# Altium PCB Bridge.PcbDoc
Units mm, origin at the board's own origin, x right, y up, seen from the top; angles counter-clockwise.
Board outline 41.53 x 42.04 mm, 2 copper layers (Top Layer, Bottom Layer); 12 components, 8 nets, 27 pads, 0 vias.
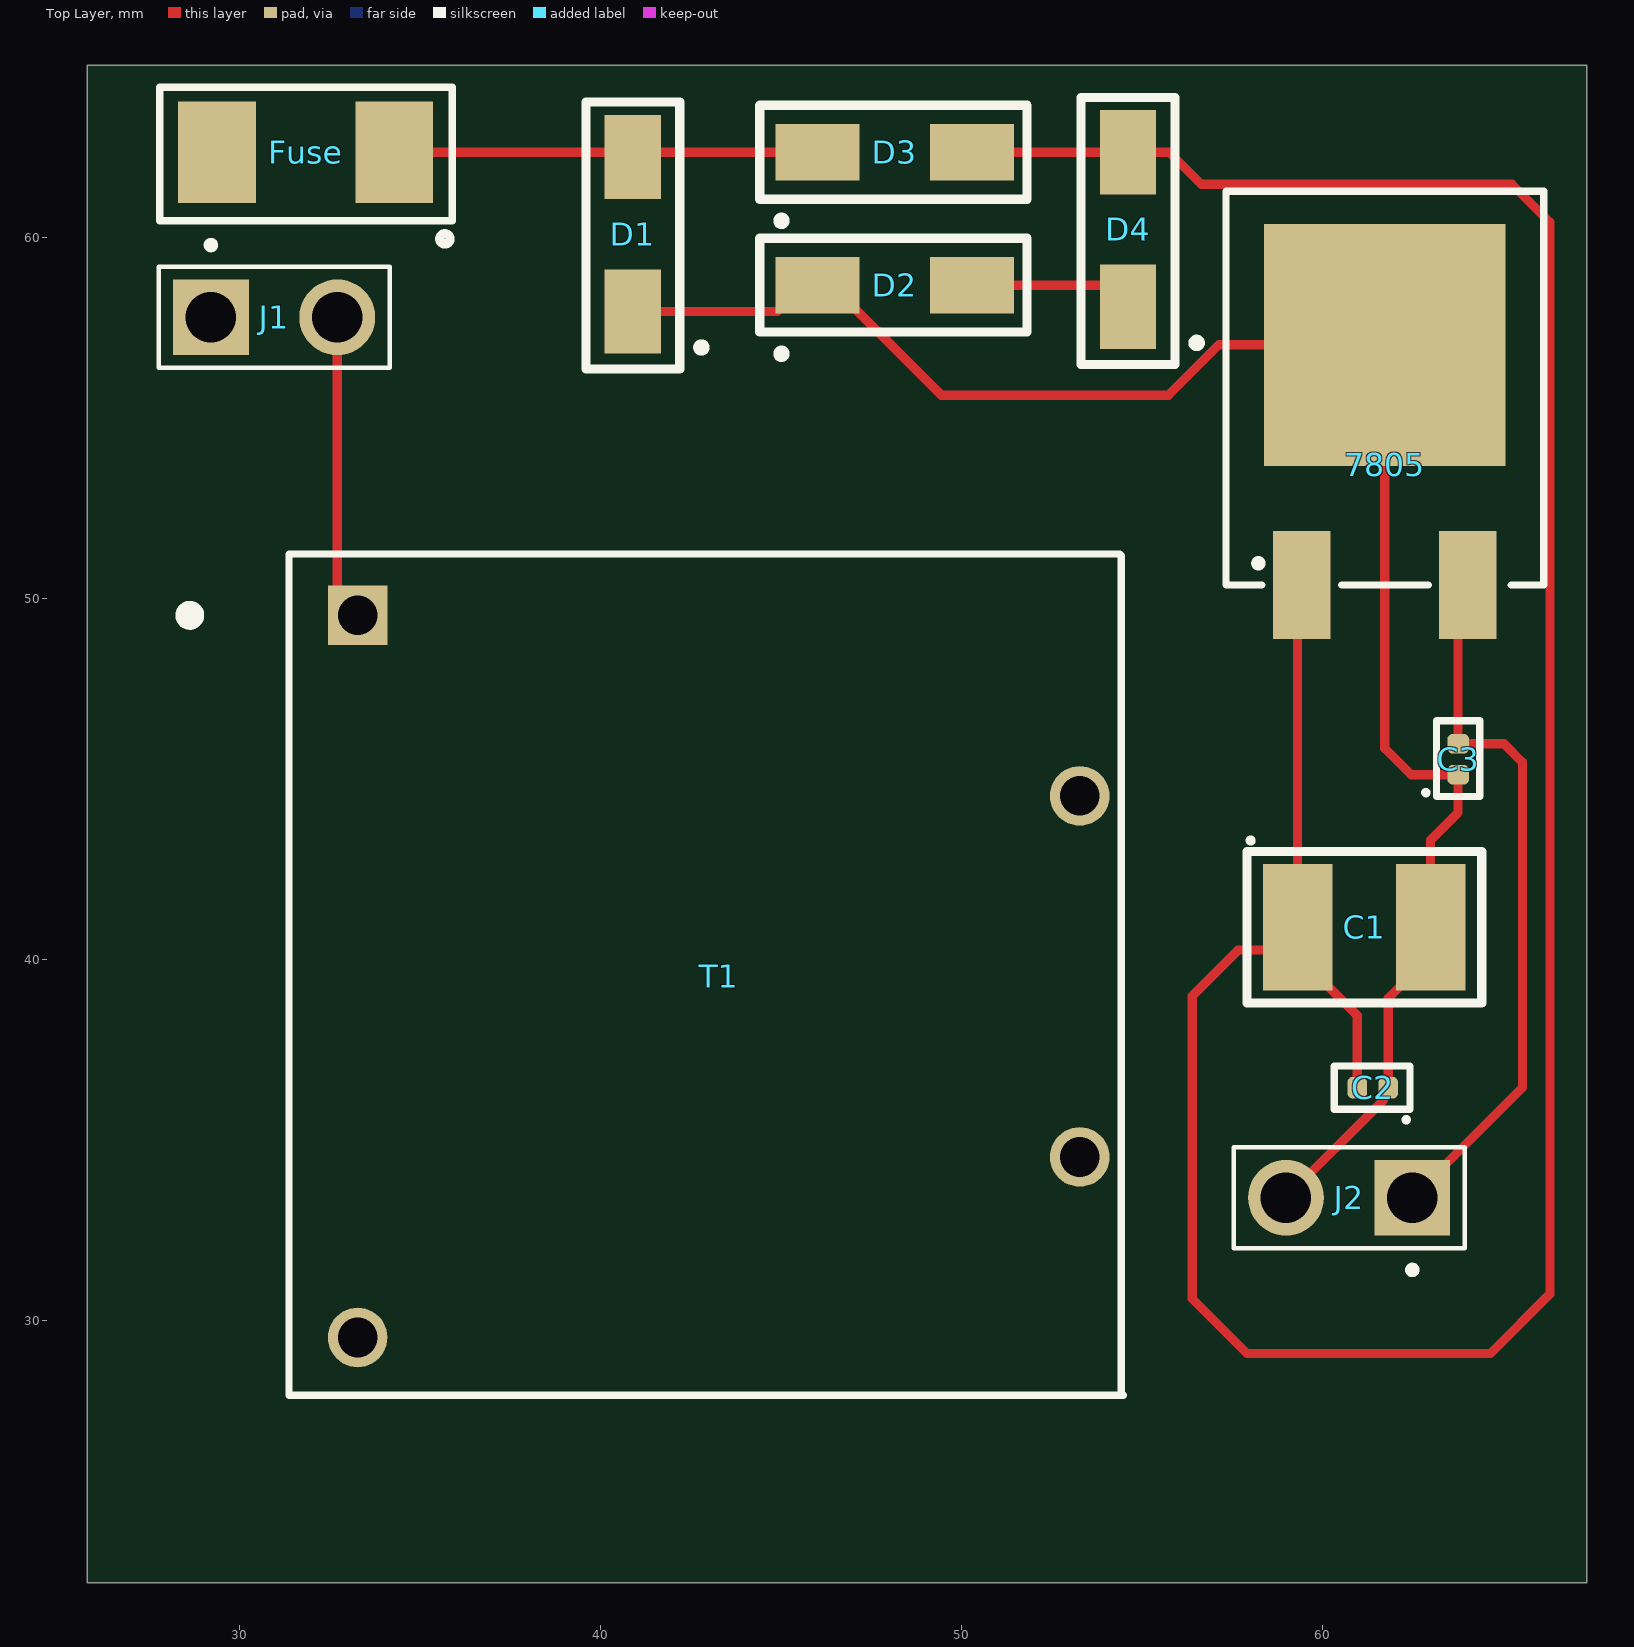
[diagram p0: Top Layer view]
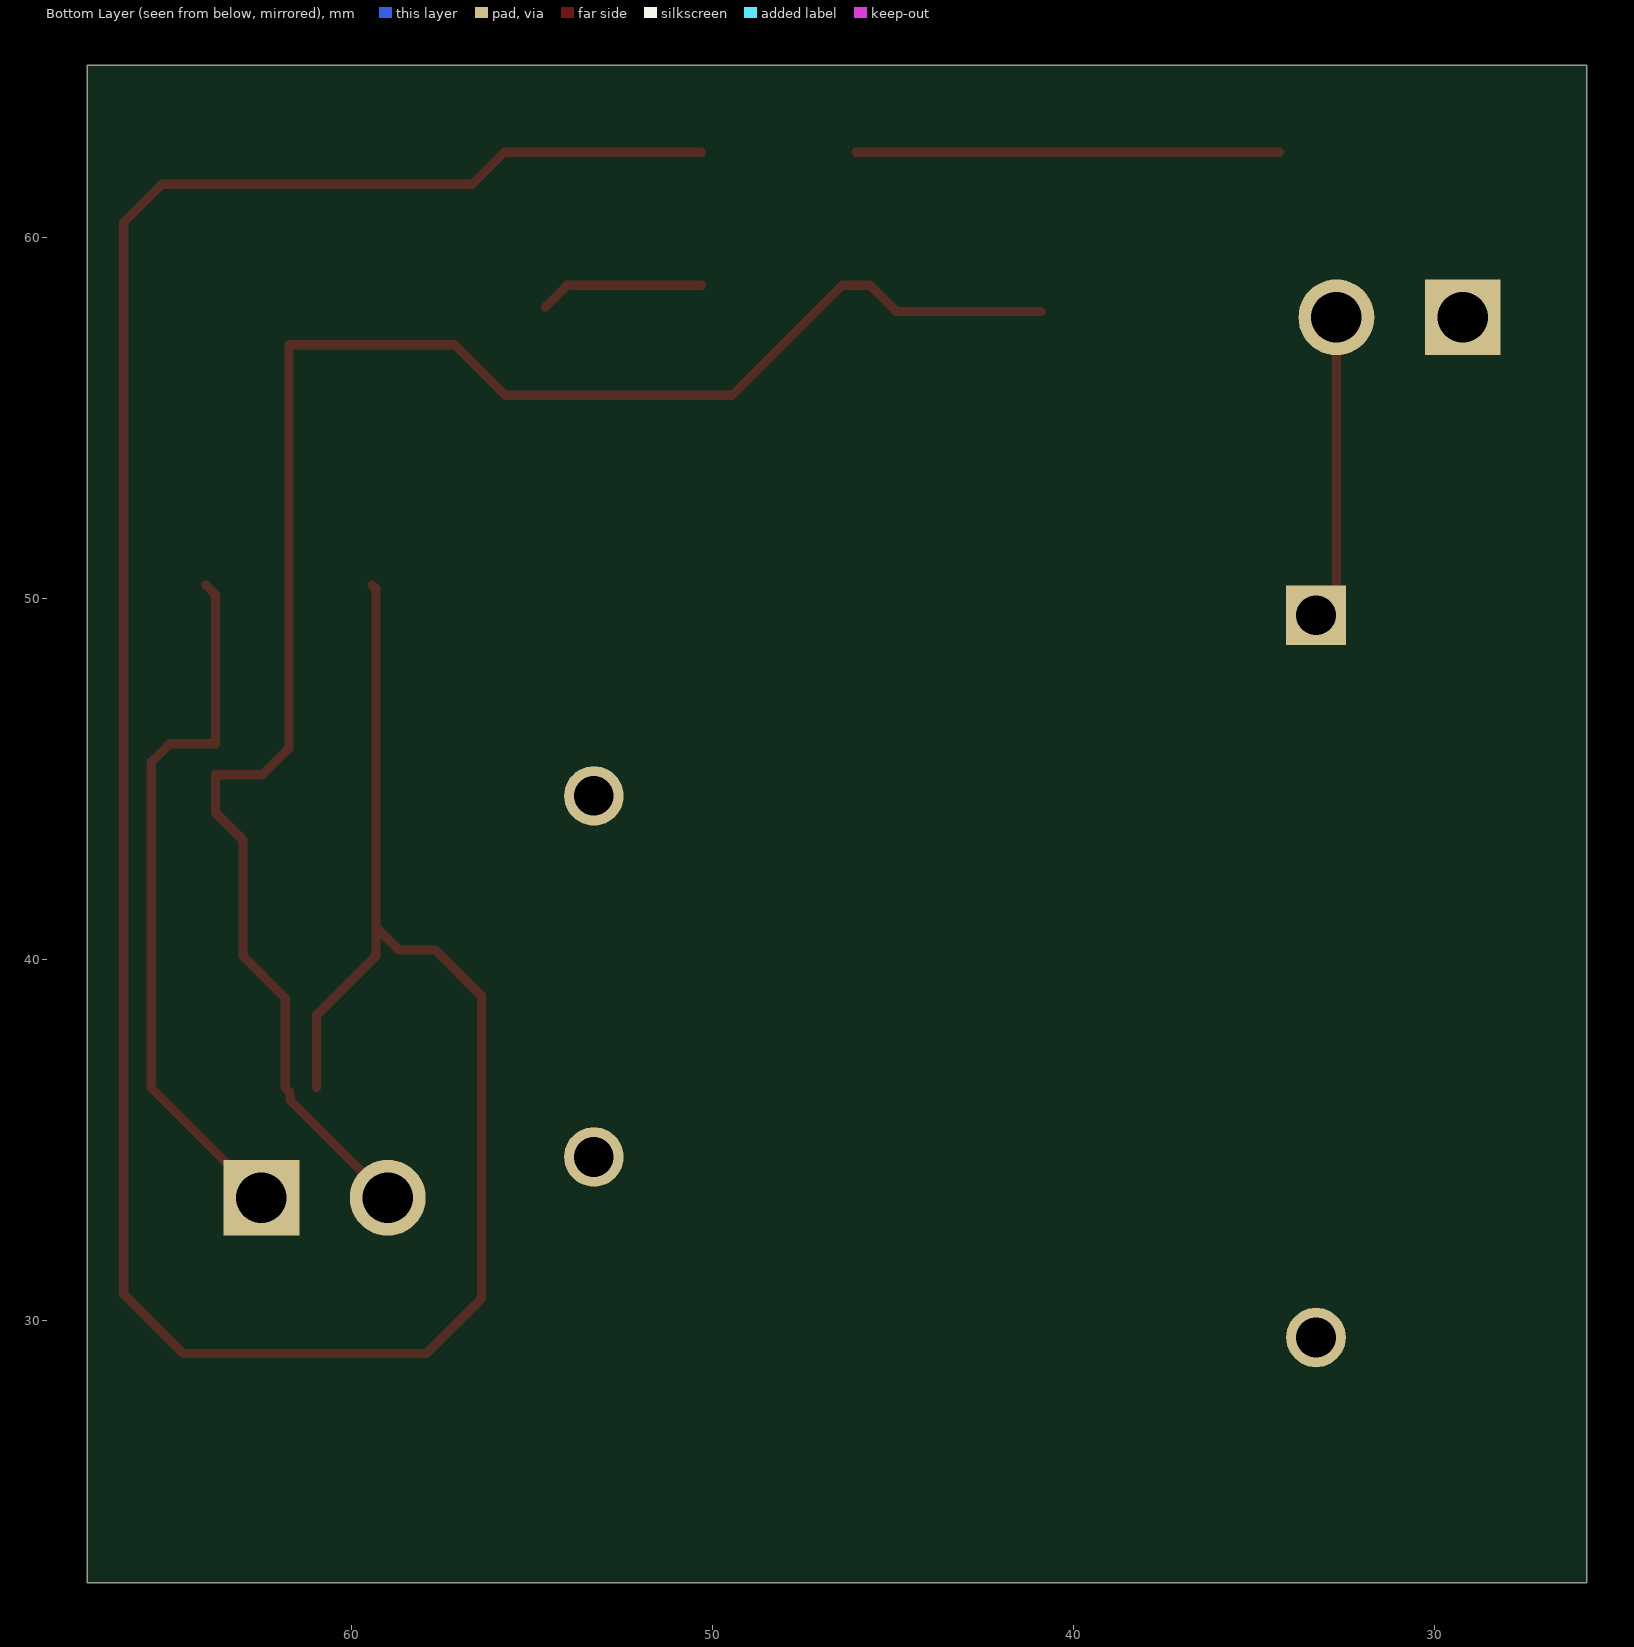
[diagram p1: Bottom Layer view, seen from below]
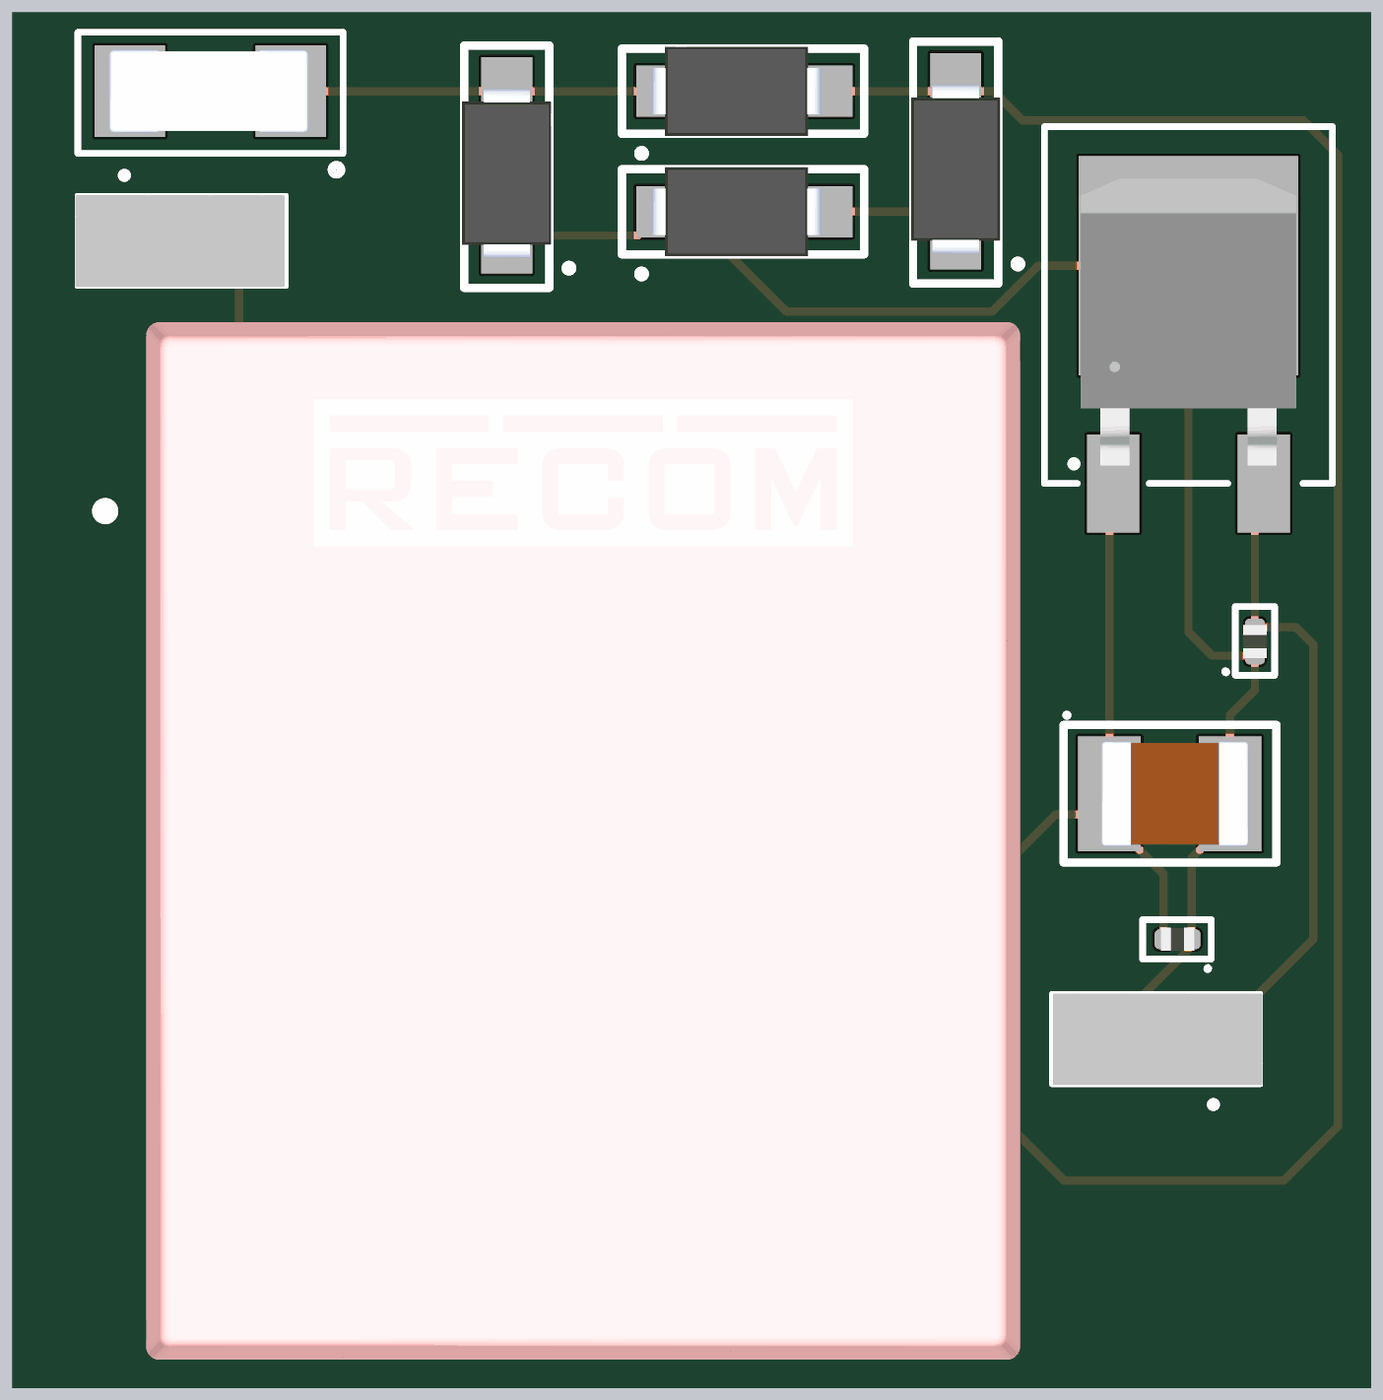
[diagram p2: 3D render of the assembled board from above, using the file's embedded part models]

## Layer stack, top to bottom
Top Solder: solder mask 0.0102, Solder Resist, Dk 3.5
Top Layer: signal copper 0.0356
Dielectric 1: dielectric 0.32, FR-4, Dk 4.8
Bottom Layer: signal copper 0.0356
Bottom Solder: solder mask 0.0102, Solder Resist, Dk 3.5

## Board outline
25.781,22.733 67.31,22.733 67.31,64.77 25.781,64.77

## Design rules (kind name [scope] priority, off if disabled: settings)
Clearance [All] p1: gap=0.254 ignorepadtopadclearanceinfootprint=FALSE except(0: Arc-Hole Track-Hole SMDPad-Hole THPad-Hole Via-Hole Fill-Hole Poly-Hole Region-Hole Text-Hole)
MinimumSolderMaskSliver [All] p1: minsoldermaskwidth=0.15
PolygonConnect [All] p1: connectstyle=Relief reliefconductorwidth=0.254 reliefentries=4 polygonreliefangle="90 Angle" airgapwidth=0.254
RoutingVias [All] p1: holewidth=0.711 width=1.27 viastyle="Through Hole" minholewidth=0.711 minwidth=1.27 maxholewidth=0.711 maxwidth=1.27
SilkToSolderMaskClearance [IsPad] p1: minsilkscreentomaskgap=0.1 clearancetoexposedcopper=TRUE
SolderMaskExpansion [All] p1: expansion=0.08 istentingtop=FALSE
Width [All] p1: maxlimit=0.254 minlimit=0.254 preferedwidth=0.254
28 further rules are at their usual default settings.

## Components (designator, comment, footprint, x,y, rotation, side; value= is the part's Value field where it differs from the comment)
7805 "L78M05CDT-TR" 7805 59.422,50.373 r90 top
C1 "470uf" 470UF 59.308,40.894 r0 top
C2 "0.1uf" 0.1UF 61.82,36.449 r180 top
C3 "0.1uf" 0.1UF 63.754,45.114 r90 top
D1 "1N4001" D1N4007 40.894,57.95 r270 top
D2 "1N4001" D1N4007 46.012,58.674 r180 top
D3 "1N4001" D1N4007 46.012,62.357 r180 top
D4 "1N4001" D1N4007 54.61,58.077 r270 top
Fuse "1A" FUSE 34.29,62.357 r180 top
J1 "1986717-2" HEADDER 29.21,57.785 r0 top
J2 "1986717-2" HEADDER 62.484,33.401 r180 top
T1 "230V" "230V AC" 33.274,49.53 r0 top

## Footprints (in the part's own frame and the unit in brackets; to place one, negate y for a bottom-side part, rotate by r counter-clockwise, add the part's x,y. Pads: shape width x height; smd on the part's side, far side on the other; paste and mask are expansions set on the pad)
0.1UF [mm]
  rrect53% 0.54x0.6 smd: 1(0,0) 2(0.86,0)
  silkscreen extent -0.6,-0.6 1.5,0.9, body extent -0.08,-0.36 0.94,0.35, height 0.52
"230V AC" [mm]
  rect 1.65x1.65 hole 1.1: 1(0,0)
  round 1.65 hole 1.1: 5(0,-20) 7(20,-15) 9(20,-5)
  silkscreen extent -4.85,-21.6 21.2,1.7, body extent -3.4,-25.93 23.3,5.77, height 21.81
470UF [mm]
  rect 1.92x3.51 smd: 1(0,0) 2(3.684,0)
  silkscreen extent -1.4,-2.1 5.1,2.41, body extent -0.25,-1.6 4.25,1.6, height 2.68
7805 [mm]
  rect 3x1.6 smd: 1(0,0) 3(0,-4.6)
  rect 6.7x6.7 smd: 2(6.65,-2.3)
  silkscreen extent 0,-6.7 10.9,2.1, body extent 0.54,-5.6 9.31,1, height 2.48
D1N4007 [mm]
  rect 2.33x1.56 smd: 1(0,0) 2(-4.28,0)
  silkscreen extent -5.8,-1.3 1.6,2, body extent -4.5,-1.36 0.7,1.36, height 2.67
FUSE [mm]
  rect 2.15x2.8 smd: 1(0,0) 2(4.91,0)
  silkscreen extent -1.6,-1.8 6.5,2.54, body extent -0.55,-1.27 5.55,1.27, height 2.8
HEADDER [mm]
  rect 2.1x2.1 hole 1.4: 1(0,0)
  round 2.1 hole 1.4: 2(3.5,0)
  silkscreen extent -1.45,-1.4 4.95,2.1, body extent -1.5,-1.4 4.9,1.4, height 9.01

## Part data
7805: "STMICROELECTRONICS - L78M05CDT-TR - VOLTAGE REG, FIXED, 5V, 0.5A, TO-252-3", Case/Package=TO-252, Dropout Voltage=2V, Manufacturer=STMicroelectronics, Max Input Voltage=35V, Max Operating Temperature=150°C, Max Output Current=500mA, Max Output Voltage=5V, Min Input Voltage=7V, Min Operating Temperature=0°C, Package Quantity=1, Power Supply Rejection Ratio (PSRR)=62dB, Quiescent Current=6mA, Supplier Part Number 1=497-1203-1-ND, Tolerance=5%, Category="Voltage Regulators - Linear", ComponentLink1Description=https://datasheet.ciiva.com/4882/cd00000447-93067-4882369.pdf?src-supplier=Mouser, ComponentLink1URL=https://datasheet.ciiva.com/4882/cd00000447-93067-4882369.pdf?src-supplier=Mouser, ComponentLink2Description=https://datasheet.ciiva.com/15111/getdatasheetpartid-111001-15111751.pdf?src-supplier=Verical, ComponentLink2URL=https://datasheet.ciiva.com/15111/getdatasheetpartid-111001-15111751.pdf?src-supplier=Verical, ComponentLink3Description=https://datasheet.ciiva.com/34303/2021024-34303902.pdf?src-supplier=Jameco, ComponentLink3URL=https://datasheet.ciiva.com/34303/2021024-34303902.pdf?src-supplier=Jameco, ComponentLink4Description=https://datasheet.ciiva.com/16443/cd00000447-16443381.pdf?src-supplier=Future+Electronics, ComponentLink4URL=https://datasheet.ciiva.com/16443/cd00000447-16443381.pdf?src-supplier=Future+Electronics, ComponentLink5Description=https://datasheet.ciiva.com/2041/cd00000447-2041990.pdf?src-supplier=Digi-Key, ComponentLink5URL=https://datasheet.ciiva.com/2041/cd00000447-2041990.pdf?src-supplier=Digi-Key, ComponentLink6Description=https://datasheet.ciiva.com/2041/cd00000447-2041991.pdf?src-supplier=Digi-Key, ComponentLink6URL=https://datasheet.ciiva.com/2041/cd00000447-2041991.pdf?src-supplier=Digi-Key, ComponentLink7Description=https://datasheet.ciiva.com/2041/cd00000447-2041992.pdf?src-supplier=Digi-Key, ComponentLink7URL=https://datasheet.ciiva.com/2041/cd00000447-2041992.pdf?src-supplier=Digi-Key, ComponentLink8Description=https://datasheet.ciiva.com/14111/tbl78mxxc-data-e-14111354.pdf?src-supplier=Distrelec, ComponentLink8URL=https://datasheet.ciiva.com/14111/tbl78mxxc-data-e-14111354.pdf?src-supplier=Distrelec, ComponentLink9Description=https://datasheet.ciiva.com/1512/1834365-1512349.pdf?src-supplier=Element14, ComponentLink9URL=https://datasheet.ciiva.com/1512/1834365-1512349.pdf?src-supplier=Element14, ComponentLink10Description=https://datasheet.ciiva.com/46425/1834365-46425535.pdf?src-supplier=Element14, ComponentLink10URL=https://datasheet.ciiva.com/46425/1834365-46425535.pdf?src-supplier=Element14, ComponentLink11Description=https://datasheet.ciiva.com/41439/001184659-da-01-en-ic-reg-ldo-5v-l78m05cdt-tr-to-252-3-stm-41439772.pdf?src-supplier=Conrad, ComponentLink11URL=https://datasheet.ciiva.com/41439/001184659-da-01-en-ic-reg-ldo-5v-l78m05cdt-tr-to-252-3-stm-41439772.pdf?src-supplier=Conrad, Contact Plating=Tin,Matte, Height=2.4mm, Lead Free="Lead Free", Length=6.6mm, Manufacturer Part Number=L78M05CDT-TR, Min Output Voltage=5V, Mount="Surface Mount", Nominal Output Voltage=5V, Number of Outputs=1, Number of Pins=3, Number of Regulators=1, Output Current=500mA, Output Type=Fixed, Output Voltage=5V, Packaging="Tape and Reel", Polarity=Positive, Pricing 1="1=0.46000, 10=0.39200, 25=0.36560, 100=0.27170, 250=0.22992, 500=0.21946, 1000=0.16198 (USD)", Radiation Hardening=No, REACH SVHC="No SVHC", RoHS=Yes, Stock 1=33280, Supplier 1=Digi-Key, Weight=0.01lb, Width=6.2mm
C1: "CAP CER 470UF 4V X5R 1812", Capacitance=470uF, Case Code (Imperial)=1812, Case Code (Metric)=4532, Manufacturer="Taiyo Yuden", Manufacturer Part Number=AMK432BJ477MM-T, Max Operating Temperature=85°C, Min Operating Temperature=-55°C, Supplier Part Number 1=587-4368-1-ND, Tolerance=20%, Voltage Rating=4V, Case/Package=1812, Category="Ceramic Capacitors", ComponentLink1Description=https://media.digikey.com/pdf/Data%20Sheets/Taiyo%20Yuden%20PDFs%20URL%20links/AMK432BJ477MM_Spec.PDF?src-supplier=Digi-Key, ComponentLink1URL=https://media.digikey.com/pdf/Data%20Sheets/Taiyo%20Yuden%20PDFs%20URL%20links/AMK432BJ477MM_Spec.PDF?src-supplier=Digi-Key, Lead Free="Lead Free", Length=0.177inch, Mount="Surface Mount", Packaging="Tape and Reel", Pricing 1="1=5.94000, 10=5.79200, 50=5.19760, 100=4.75200 (USD)", RoHS=Yes, Stock 1=613, Supplier 1=Digi-Key, Thickness=0.106inch, Width=0.126inch
C2 C3: library part CC0402ZRY5V7BB104, "Multilayer Ceramic Capacitors MLCC - SMD/SMT 100nF 16V Y5V -20/+80%", Capacitance=100nF, Case Code (Imperial)=0402, Case Code (Metric)=1005, Dielectric=Y5V, Insulation Resistance=100GR, Manufacturer=Yageo, Max Operating Temperature=85°C, Min Operating Temperature=-30°C, Package Quantity=10000, Resistor Type=Ceramic, Supplier Part Number 1=311-1047-1-ND, Tolerance=80%, Voltage Rating=16V, Case/Package=0402, Category="Ceramic Capacitors", ComponentLink1Description=https://datasheet.ciiva.com/26862/getdatasheetpartid-403483-26862665.pdf?src-supplier=Verical, ComponentLink1URL=https://datasheet.ciiva.com/26862/getdatasheetpartid-403483-26862665.pdf?src-supplier=Verical, ComponentLink2Description=https://datasheet.ciiva.com/143/mlccorderingcode-143947.pdf?src-supplier=Digi-Key, ComponentLink2URL=https://datasheet.ciiva.com/143/mlccorderingcode-143947.pdf?src-supplier=Digi-Key, ComponentLink3Description=https://datasheet.ciiva.com/143/mlccorderingcode-143948.pdf?src-supplier=Digi-Key, ComponentLink3URL=https://datasheet.ciiva.com/143/mlccorderingcode-143948.pdf?src-supplier=Digi-Key, ComponentLink4Description=https://datasheet.ciiva.com/143/mlccorderingcode-143949.pdf?src-supplier=Digi-Key, ComponentLink4URL=https://datasheet.ciiva.com/143/mlccorderingcode-143949.pdf?src-supplier=Digi-Key, ComponentLink5Description=https://datasheet.ciiva.com/11586/upy-gphc-y5v-6-3v-to-50v-5-11586519.pdf?src-supplier=Avnet, ComponentLink5URL=https://datasheet.ciiva.com/11586/upy-gphc-y5v-6-3v-to-50v-5-11586519.pdf?src-supplier=Avnet, ComponentLink6Description=https://datasheet.ciiva.com/28450/1132289-28450424.pdf?src-supplier=Element14, ComponentLink6URL=https://datasheet.ciiva.com/28450/1132289-28450424.pdf?src-supplier=Element14, ComponentLink7Description=https://datasheet.ciiva.com/7978/1132289-7978122.pdf?src-supplier=Element14, ComponentLink7URL=https://datasheet.ciiva.com/7978/1132289-7978122.pdf?src-supplier=Element14, ComponentLink8Description=https://datasheet.ciiva.com/8033/1132289-8033645.pdf?src-supplier=Element14, ComponentLink8URL=https://datasheet.ciiva.com/8033/1132289-8033645.pdf?src-supplier=Element14, ComponentLink9Description=https://datasheet.ciiva.com/8033/1132289-8033647.pdf?src-supplier=Element14, ComponentLink9URL=https://datasheet.ciiva.com/8033/1132289-8033647.pdf?src-supplier=Element14, ComponentLink10Description=https://datasheet.ciiva.com/13386/upy-gphc-y5v-6-3v-to-50v-5-13386335.pdf?src-supplier=Mouser, ComponentLink10URL=https://datasheet.ciiva.com/13386/upy-gphc-y5v-6-3v-to-50v-5-13386335.pdf?src-supplier=Mouser, Depth=0.5mm, Halogen Free="Halogen Free", Height=0.5mm, Lead Free="Lead Free", Length=1mm, Manufacturer Part Number=CC0402ZRY5V7BB104, Mount="Surface Mount", Packaging="Tape and Reel", Pricing 1="1=0.10000, 10=0.01900, 50=0.01020, 100=0.00830, 500=0.00592, 1000=0.00466, 2500=0.00424, 5000=0.00390 (USD)", Radiation Hardening=No, REACH SVHC="No SVHC", RoHS=Yes, Stock 1=3045044, Supplier 1=Digi-Key, Termination=SMD/SMT, Thickness=0.022inch, Voltage Rating (DC)=16V, Width=0.02inch
D1 D2 D3 D4: "DIODE GEN PURP 50V 1A DO41", Average Rectified Current=1A, Capacitance=15pF, Forward Voltage=1.1V, Manufacturer="ON Semiconductor / Fairchild", Max Forward Surge Current (Ifsm)=30A, Max Operating Temperature=175°C, Max Repetitive Reverse Voltage (Vrrm)=50V, Max Reverse Current=5uA, Min Operating Temperature=-55°C, Package Quantity=1000, Power Dissipation=3W, Category="Rectifier Diodes", ComponentLink1Description=https://datasheet.ciiva.com/910/1n4001-910352.pdf?src-supplier=Digi-Key, ComponentLink1URL=https://datasheet.ciiva.com/910/1n4001-910352.pdf?src-supplier=Digi-Key, ComponentLink2Description=https://datasheet.ciiva.com/910/1n4001-910352.pdf?src-supplier=Avnet, ComponentLink2URL=https://datasheet.ciiva.com/910/1n4001-910352.pdf?src-supplier=Avnet, ComponentLink3Description=https://datasheet.ciiva.com/4452/1n4004-81693-4452416.pdf?src-supplier=Mouser, ComponentLink3URL=https://datasheet.ciiva.com/4452/1n4004-81693-4452416.pdf?src-supplier=Mouser, ComponentLink4Description=https://datasheet.ciiva.com/30479/0900766b810c07cd-30479188.pdf?src-supplier=RSComponents, ComponentLink4URL=https://datasheet.ciiva.com/30479/0900766b810c07cd-30479188.pdf?src-supplier=RSComponents, ComponentLink5Description=https://datasheet.ciiva.com/910/1n4001-910353.pdf?src-supplier=Digi-Key, ComponentLink5URL=https://datasheet.ciiva.com/910/1n4001-910353.pdf?src-supplier=Digi-Key, ComponentLink6Description=https://datasheet.ciiva.com/927/1n4001-d-927540.pdf?src-supplier=Digi-Key, ComponentLink6URL=https://datasheet.ciiva.com/927/1n4001-d-927540.pdf?src-supplier=Digi-Key, ComponentLink7Description=https://datasheet.ciiva.com/22685/1504060-22685765.pdf?src-supplier=Element14, ComponentLink7URL=https://datasheet.ciiva.com/22685/1504060-22685765.pdf?src-supplier=Element14, ComponentLink8Description=https://datasheet.ciiva.com/15208/getdatasheetpartid-148723-15208346.pdf?src-supplier=Verical, ComponentLink8URL=https://datasheet.ciiva.com/15208/getdatasheetpartid-148723-15208346.pdf?src-supplier=Verical, ComponentLink9Description=https://datasheet.ciiva.com/8084/1n4007-8084076.pdf?src-supplier=Avnet, ComponentLink9URL=https://datasheet.ciiva.com/8084/1n4007-8084076.pdf?src-supplier=Avnet, ComponentLink10Description=https://datasheet.ciiva.com/22651/1923868-22651932.pdf?src-supplier=Element14, ComponentLink10URL=https://datasheet.ciiva.com/22651/1923868-22651932.pdf?src-supplier=Element14, Contact Plating=Tin,Matte, Current Rating=1A, Diameter=2.72mm, Element Configuration=Single, Forward Current=1A, Height=5.2mm, Lead Free="Lead Free", Length=5.2mm, Manufacturer Part Number=1N4001, Max Reverse Voltage (DC)=50V, Max Surge Current=30A, Mount="Through Hole", Number of Pins=2, Output Current=1A, Packaging="Tape and Reel", Peak Non-Repetitive Surge Current=30A, Polarity=Standard, Pricing 1="25000=0.01307, 26000=0.01280, 51000=0.01260, 130000=0.01240, 250000=0.01220 (USD)", Radiation Hardening=No, REACH SVHC="No SVHC", Reverse Voltage=50V, RoHS=Yes, Supplier 1=Avnet, Supplier Part Number 1=1N4001, Voltage Rating (DC)=50V, Weight=0.245g, Width=0.25inch
Fuse: library part 0679L1000-01, "FUSE BRD MNT 1A 125VAC/VDC", Case Code (Imperial)=2410, Case Code (Metric)=6125, DC Cold Resistance=90mR, Manufacturer=Bel, Max Operating Temperature=125°C, Min Operating Temperature=-55°C, Supplier Part Number 1=507-1965-1-ND, Voltage Rating (AC)=125V, Approvals=cURus, Case/Package=2410, Category=Fuses, ComponentLink1Description=http://www.belfuse.com/resources/CircuitProtection/datasheets/0679L%20Sep2016.pdf?src-supplier=Digi-Key, ComponentLink1URL=http://www.belfuse.com/resources/CircuitProtection/datasheets/0679L%20Sep2016.pdf?src-supplier=Digi-Key, ComponentLink2Description=https://www.belfuse.com/resources/CircuitProtection/datasheets/0679L%20Sep2016.pdf?src-supplier=Digi-Key, ComponentLink2URL=https://www.belfuse.com/resources/CircuitProtection/datasheets/0679L%20Sep2016.pdf?src-supplier=Digi-Key, Current Rating=1A, Fuse Type="Board Mount (Cartridge Style Excluded)", Height=0.11inch, Length=0.24inch, Manufacturer Part Number=0679L1000-01, Mount="Surface Mount", Packaging="Tape and Reel", Pricing 1="1=0.32000, 5=0.31000, 10=0.29600, 50=0.26400, 100=0.24570, 250=0.21840, 500=0.18200 (USD)", RoHS=Yes, Stock 1=434, Supplier 1=Digi-Key, Voltage Rating (DC)=125V, Width=0.1inch
J1 J2: "Headers & Wire Housings UNSHRDED STD HDR 3.5MM 2POS", Color=Green, Contact Resistance=15mR, Current=2A, Manufacturer="TE Connectivity", Max Operating Temperature=110°C, Min Operating Temperature=-40°C, Package Quantity=300, Supplier Part Number 1=A104641-ND, Voltage=150V, Voltage Rating=130V, Category="Headers and Wire Housings", ComponentLink1Description=https://datasheet.ciiva.com/9465/eng-cd-1986717-b1-9465729.pdf?src-supplier=Avnet, ComponentLink1URL=https://datasheet.ciiva.com/9465/eng-cd-1986717-b1-9465729.pdf?src-supplier=Avnet, ComponentLink2Description=https://datasheet.ciiva.com/30492/0900766b81226684-30492513.pdf?src-supplier=RSComponents, ComponentLink2URL=https://datasheet.ciiva.com/30492/0900766b81226684-30492513.pdf?src-supplier=RSComponents, ComponentLink3Description=https://datasheet.ciiva.com/7624/1651060-7624901.pdf?src-supplier=Element14, ComponentLink3URL=https://datasheet.ciiva.com/7624/1651060-7624901.pdf?src-supplier=Element14, ComponentLink4Description=https://datasheet.ciiva.com/36854/eng-ds-5-1773463-2-flush-mount-spring-type-0312-36854555.pdf?src-supplier=Onlinecomponents.com, ComponentLink4URL=https://datasheet.ciiva.com/36854/eng-ds-5-1773463-2-flush-mount-spring-type-0312-36854555.pdf?src-supplier=Onlinecomponents.com, ComponentLink5Description=https://datasheet.ciiva.com/6746/eng-cd-1986717-b2-6746909.pdf?src-supplier=Digi-Key, ComponentLink5URL=https://datasheet.ciiva.com/6746/eng-cd-1986717-b2-6746909.pdf?src-supplier=Digi-Key, Connector Type=Header, Contact Gender=Male, Contact Material="Copper Alloy", Contact Plating=Tin, Current Rating=2A, Depth=2.8mm, ELV=Compliant, Housing Color=Green, Housing Material=Polyamide, Interlock="No (Without)", Length=8.58mm, Manufacturer Part Number=1986717-2, Max Current Rating=2A, Mount="Through Hole", Number of Contacts=2, Number of Levels=1, Number of Poles=2, Number of Positions=2, Number of Positions Per Level=2, Number of Rows=1, Orientation=Straight, Packaging=Bulk, Pin Length=0.275inch, Pitch=3.5mm, Plating Thickness=3um, Pricing 1="1=0.74000, 10=0.46000, 25=0.39360, 50=0.35360, 100=0.34630, 250=0.29476, 500=0.28000, 1000=0.25053, 5000=0.19600 (USD)", Radiation Hardening=No, REACH SVHC=Unknown, RoHS=Yes, Screw Flange="No (Without)", Screwless Terminal Block="Yes (With)", Shrouded="No (Without)", Side Stackable="No (Without)", Stock 1=98, Supplier 1=Digi-Key, Tail Length=3.5mm, Termination=Solder
T1: library part RAC05-12SK/277, "AC-DC; Converter; 4.2kV reg; Single Output; 5W; 12V Out; RAC05-K/277 Series", Manufacturer=Recom, Max Operating Temperature=85°C, Max Output Current=416mA, Max Output Voltage=12V, Max Power Dissipation=5W, Min Operating Temperature=-40°C, Supplier Part Number 1=945-3192-ND, Approvals=CE,cURus, Category="Voltage Regulators - Switching", ComponentLink1Description=https://www.recom-power.com/pdf/Powerline_AC-DC/RAC05-K_277.pdf?src-supplier=Digi-Key, ComponentLink1URL=https://www.recom-power.com/pdf/Powerline_AC-DC/RAC05-K_277.pdf?src-supplier=Digi-Key, Efficiency=83%, Height=21.8mm, Length=31.7mm, Manufacturer Part Number=RAC05-12SK/277, Mount="Through Hole", Number of Outputs=1, Pricing 1="1=10.15000, 5=10.00600, 10=9.86000, 25=9.28000, 50=8.99000, 100=8.70000, 250=8.41000, 500=8.12000 (USD)", RoHS=No, Stock 1=71, Supplier 1=Digi-Key, Voltage - Output 1=12V, Weight=31.5g, Width=26.7mm

## Nets (pads, with @x,y where several pads share a name; then routed paths per layer and width w, separated by ;. In a path a pad name is that pad's centre, name@x,y a point inside that pad or via, vN(x,y) a via of type N, cw(c..) or ccw(c..) an arc to the next point about the centre after c; other vN are vias at no path point)
Net7805_1: 7805.1 C1.1 C2.2 D3.2 D4.2 | length 84.5
  Top Layer w0.254: D3.2 D4.2 55.753,62.357 56.642,61.468 65.241,61.468 66.294,60.415 66.294,30.734 64.643,29.083 57.912,29.083 56.388,30.607 56.388,38.989 57.658,40.259 58.673,40.259 C1.1 ; 7805.1 59.308,50.259 C1.1 ; C2.2 60.96,38.447 59.308,40.099 C1.1
Net7805_2: 7805.2 C1.2 C2.1 C3.1 D1.1 D2.1 J2.2 | length 50.2
  Top Layer w0.254: D1.1 44.903,57.95 45.627,58.674 D2.1 46.397,58.674 49.445,55.626 55.729,55.626 57.126,57.023 7805.2 61.722,45.847 62.455,45.114 C3.1 63.754,44.069 62.992,43.307 C1.2 62.992,40.099 61.82,38.927 C2.1 61.687,36.316 61.687,36.104 J2.2
Net7805_3: 7805.3 C3.2 J2.1 | length 19.8
  Top Layer w0.254: J2.1 65.532,36.449 65.532,45.466 65.024,45.974 C3.2 63.754,50.105 7805.3
NetD1_2: D1.2 D3.1 Fuse.1 | length 11.7
  Top Layer w0.254: Fuse.1 D3.1
NetD2_2: D2.2 D4.1 | length 4.6
  Top Layer w0.254: D2.2 54.013,58.674 D4.1
NetFuse_2: Fuse.2
NetJ1_1: J1.1
NetJ1_2: J1.2 T1.1 | length 8.5
  Top Layer w0.254: J1.2 32.71,50.094 T1.1
pads on no net: T1.5 T1.7 T1.9